# Altium PCB PCB1.PcbDoc
Units mm, origin at the board's own origin, x right, y up, seen from the top; angles counter-clockwise.
Board outline 138.06 x 60 mm, 2 copper layers (Top Layer, Bottom Layer); 63 components, 28 nets, 228 pads, 0 vias.
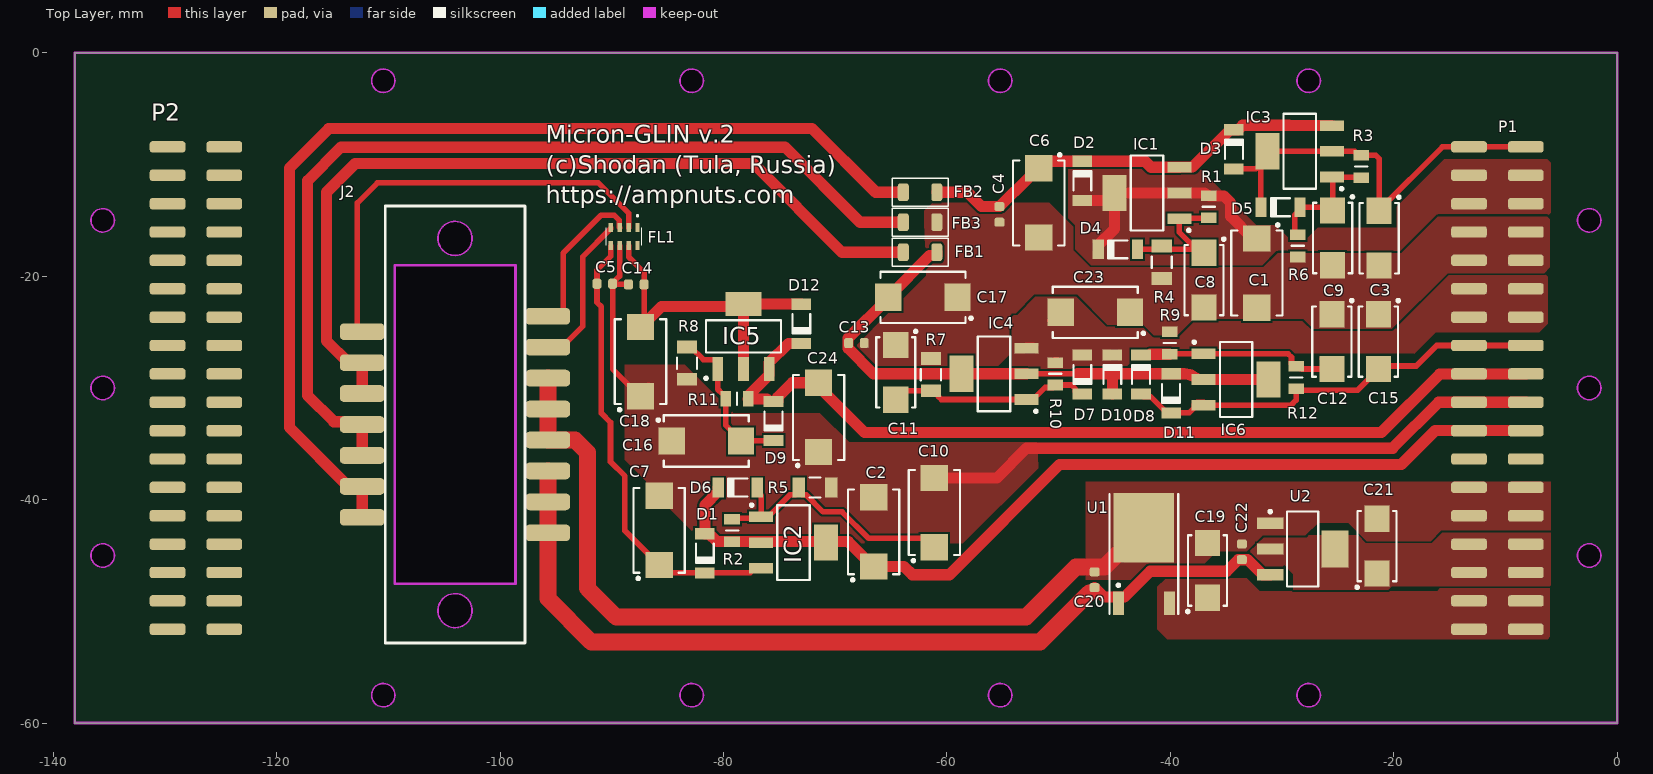
[diagram p0: Top Layer view]
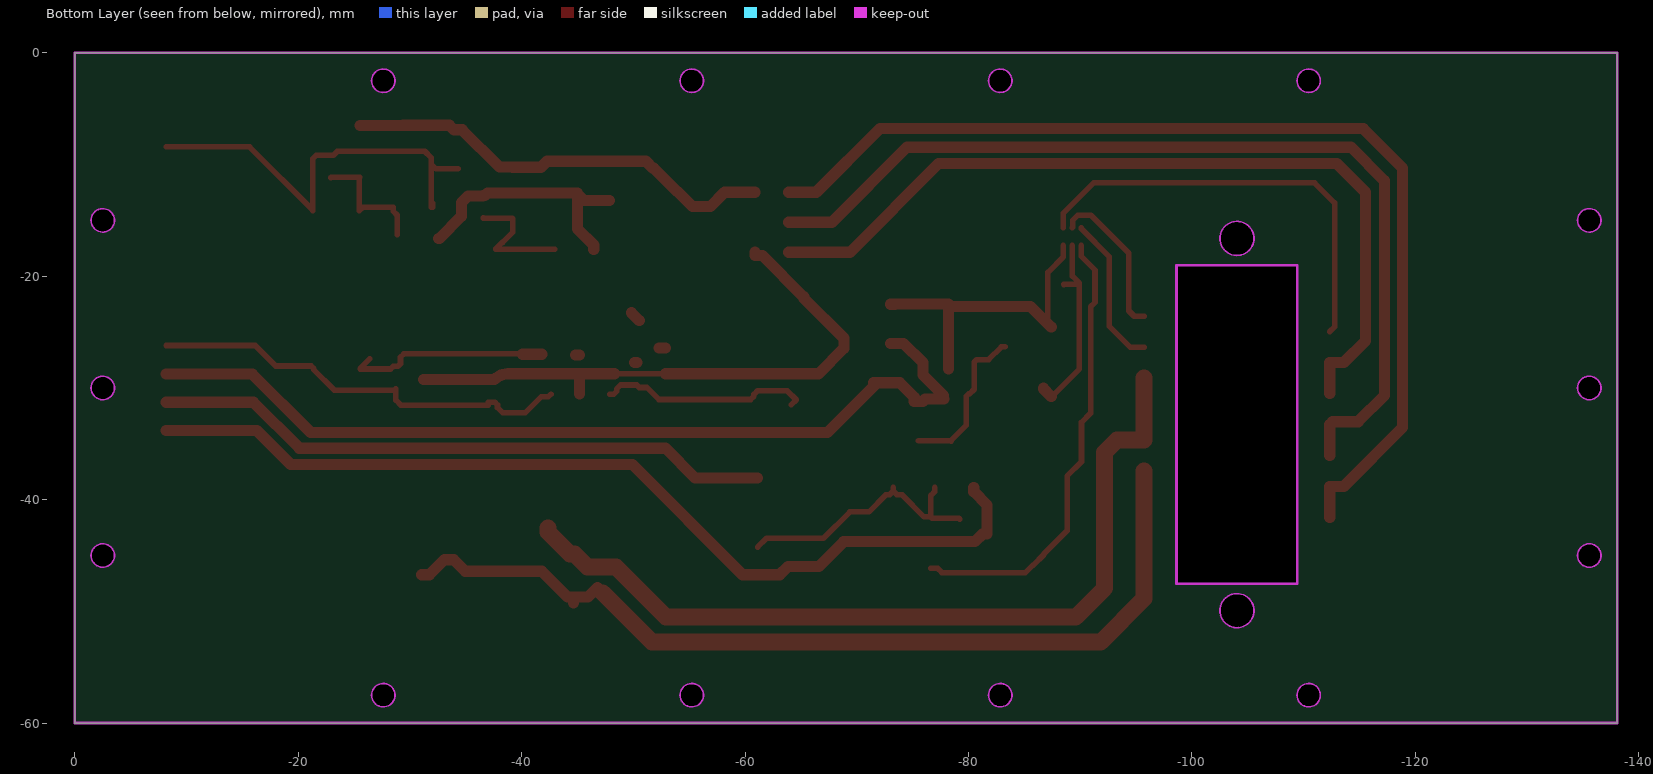
[diagram p1: Bottom Layer view, seen from below]
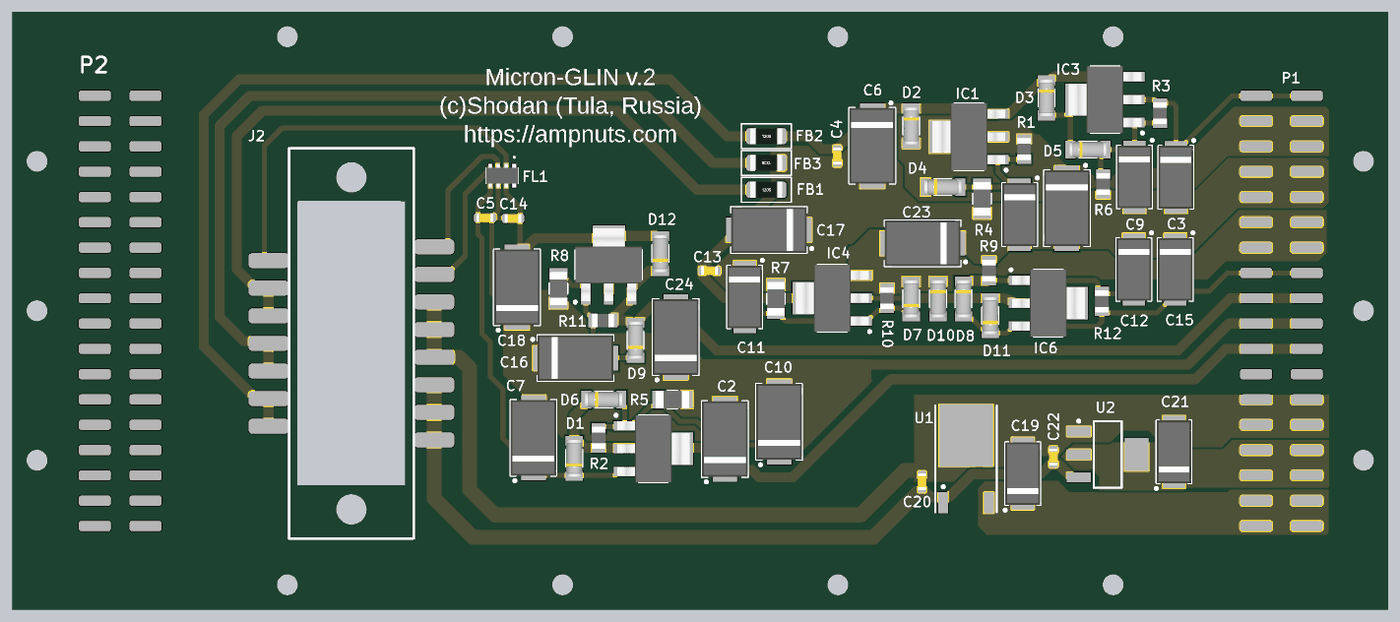
[diagram p2: 3D render of the assembled board from above, using the file's embedded part models]

## Layer stack, top to bottom
Top Solder: solder mask 0.0102, Solder Resist, Dk 3.5
Top Layer: signal copper 0.0356
Dielectric 1: dielectric 0.32, FR-4, Dk 4.8
Bottom Layer: signal copper 0.0356
Bottom Solder: solder mask 0.0102, Solder Resist, Dk 3.5

## Board outline
-138.064,-60 0,-60 0,0 -138.064,0
cut-out: -104.028,-51.458 cw(c-104.028,-49.933) -105.553,-49.933 cw(c-104.028,-49.933) -104.028,-48.408 cw(c-104.028,-49.933) -102.503,-49.933 cw(c-104.028,-49.933)
cut-out: -104.028,-18.138 cw(c-104.028,-16.613) -105.553,-16.613 cw(c-104.028,-16.613) -104.028,-15.088 cw(c-104.028,-16.613) -102.503,-16.613 cw(c-104.028,-16.613)
cut-out: -110.451,-58.55 cw(c-110.451,-57.5) -111.501,-57.5 cw(c-110.451,-57.5) -110.451,-56.45 cw(c-110.451,-57.5) -109.401,-57.5 cw(c-110.451,-57.5)
cut-out: -82.838,-58.55 cw(c-82.838,-57.5) -83.888,-57.5 cw(c-82.838,-57.5) -82.838,-56.45 cw(c-82.838,-57.5) -81.788,-57.5 cw(c-82.838,-57.5)
cut-out: -56.276,-57.5 ccw(c-55.226,-57.5) -55.226,-58.55 ccw(c-55.226,-57.5) -54.176,-57.5 ccw(c-55.226,-57.5) -55.226,-56.45 ccw(c-55.226,-57.5)
cut-out: -28.663,-57.5 ccw(c-27.613,-57.5) -27.613,-58.55 ccw(c-27.613,-57.5) -26.563,-57.5 ccw(c-27.613,-57.5) -27.613,-56.45 ccw(c-27.613,-57.5)
cut-out: -3.55,-45 ccw(c-2.5,-45) -2.5,-46.05 ccw(c-2.5,-45) -1.45,-45 ccw(c-2.5,-45) -2.5,-43.95 ccw(c-2.5,-45)
cut-out: -3.55,-30 ccw(c-2.5,-30) -2.5,-31.05 ccw(c-2.5,-30) -1.45,-30 ccw(c-2.5,-30) -2.5,-28.95 ccw(c-2.5,-30)
cut-out: -3.55,-15 ccw(c-2.5,-15) -2.5,-16.05 ccw(c-2.5,-15) -1.45,-15 ccw(c-2.5,-15) -2.5,-13.95 ccw(c-2.5,-15)
cut-out: -27.613,-3.55 cw(c-27.613,-2.5) -28.663,-2.5 cw(c-27.613,-2.5) -27.613,-1.45 cw(c-27.613,-2.5) -26.563,-2.5 cw(c-27.613,-2.5)
cut-out: -55.226,-3.55 cw(c-55.226,-2.5) -56.276,-2.5 cw(c-55.226,-2.5) -55.226,-1.45 cw(c-55.226,-2.5) -54.176,-2.5 cw(c-55.226,-2.5)
cut-out: -82.838,-3.55 cw(c-82.838,-2.5) -83.888,-2.5 cw(c-82.838,-2.5) -82.838,-1.45 cw(c-82.838,-2.5) -81.788,-2.5 cw(c-82.838,-2.5)
cut-out: -110.451,-3.55 cw(c-110.451,-2.5) -111.501,-2.5 cw(c-110.451,-2.5) -110.451,-1.45 cw(c-110.451,-2.5) -109.401,-2.5 cw(c-110.451,-2.5)
cut-out: -135.564,-16.05 cw(c-135.564,-15) -136.614,-15 cw(c-135.564,-15) -135.564,-13.95 cw(c-135.564,-15) -134.514,-15 cw(c-135.564,-15)
cut-out: -135.564,-31.05 cw(c-135.564,-30) -136.614,-30 cw(c-135.564,-30) -135.564,-28.95 cw(c-135.564,-30) -134.514,-30 cw(c-135.564,-30)
cut-out: -135.564,-46.05 cw(c-135.564,-45) -136.614,-45 cw(c-135.564,-45) -135.564,-43.95 cw(c-135.564,-45) -134.514,-45 cw(c-135.564,-45)
cut-out: -109.428,-19.023 -98.628,-19.023 -98.628,-47.523 -109.428,-47.523

## Design rules (kind name [scope] priority, off if disabled: settings)
BoardOutlineClearance [All] p1: gap=0.25 ignorepadtopadclearanceinfootprint=FALSE
Clearance [All] p1: gap=0.2 ignorepadtopadclearanceinfootprint=FALSE
HoleSize [All] p1: absolutevalues=TRUE maxlimit=5 minlimit=0.9 maxpercent=80.000 minpercent=20.000
HoleToHoleClearance [All] p1: gap=0.2 allowstackedmicrovias=TRUE
PlaneClearance [All] p1: clearance=0.2
PlaneConnect [All] p1: planeconnectstyle=Direct reliefexpansion=0.508 reliefentries=4 reliefconductorwidth=0.254 reliefairgap=0.254
PolygonConnect [All] p1: connectstyle=Direct reliefconductorwidth=0.254 reliefentries=4 polygonreliefangle="90 Angle" airgapwidth=0.254
RoutingLayers [All] p1: top layer_v5=TRUE bottom layer_v5=FALSE
RoutingVias [All] p1: holewidth=0.711 width=1.27 viastyle="Through Hole" minholewidth=0.711 minwidth=1.27 maxholewidth=0.711 maxwidth=1.27
SolderMaskExpansion [All] p1: expansion=0.1 istentingtop=FALSE
Width [All] p1: maxlimit=2 minlimit=0.2 preferedwidth=0.5
25 further rules are at their usual default settings.

## Components (designator, comment, footprint, x,y, rotation, side; value= is the part's Value field where it differs from the comment)
C1 "2.2uF 50V D" CAPMP7343X310N -32.256,-19.712 r270 top
C2 "2.2uF 50V D" CAPMP7343X310N -66.56,-42.88 r90 top
C3 "10uF 16V C" CAPMP6032X280N -21.312,-16.594 r270 top
C4 "100nF 100V 0603" 1608[0603]_CAP -55.296,-14.464 r270 top
C5 "100nF 100V 0603" 1608[0603]_CAP -90.624,-20.672 r0 top
C6 "2.2uF 50V D" CAPMP7343X310N -51.776,-13.44 r270 top
C7 "2.2uF 50V D" CAPMP7343X310N -85.76,-42.752 r90 top
C8 "10uF 35V C" CAPMP6032X280N -36.992,-20.352 r270 top
C9 "10uF 16V C" CAPMP6032X280N -25.472,-16.576 r270 top
C10 "2.2uF 50V D" CAPMP7343X310N -61.12,-41.152 r90 top
C11 "10uF 35V C" CAPMP6032X280N -64.576,-28.608 r270 top
C12 "10uF 16V C" CAPMP6032X280N -25.536,-25.856 r270 top
C13 "100nF 100V 0603" 1608[0603]_CAP -68.096,-25.984 r180 top
C14 "100nF 100V 0603" 1608[0603]_CAP -87.808,-20.736 r0 top
C15 "10uF 16V C" CAPMP6032X280N -21.376,-25.856 r270 top
C16 "2.2uF 50V D" CAPMP7343X310N -81.536,-34.752 r0 top
C17 "2.2uF 50V D" CAPMP7343X310N -62.144,-21.888 r180 top
C18 "2.2uF 50V D" CAPMP7343X310N -87.424,-27.648 r90 top
C19 "10uF 16V C" CAPMP6032X280N -36.672,-46.336 r90 top
C20 "100nF 100V 0603" 1608[0603]_CAP -46.784,-47.168 r90 top
C21 "10uF 16V C" CAPMP6032X280N -21.504,-44.16 r90 top
C22 "100nF 100V 0603" 1608[0603]_CAP -33.6,-44.672 r90 top
C23 "2.2uF 50V D" CAPMP7343X310N -46.72,-23.232 r180 top
C24 "2.2uF 50V D" CAPMP7343X310N -71.488,-32.64 r90 top
D1 "BZV55-C36" DIOMELF3515N -81.664,-44.8 r90 top
D2 "EGL1D" DIOMELF3515N -47.872,-11.456 r270 top
D3 "EGL1D" DIOMELF3515N -34.304,-8.64 r270 top
D4 "EGL1D" DIOMELF3515N -44.7,-17.592 r0 top
D5 "EGL1D" DIOMELF3515N -30.144,-13.824 r0 top
D6 "BZV55-C5V6" DIOMELF3515N -78.72,-38.912 r0 top
D7 "EGL1D" DIOMELF3515N -47.872,-28.8 r90 top
D8 "EGL1D" DIOMELF3515N -42.624,-28.8 r270 top
D9 "BZV55-C5V6" DIOMELF3515N -75.52,-32.96 r90 top
D10 "EGL1D" DIOMELF3515N -45.184,-28.8 r270 top
D11 "EGL1D" DIOMELF3515N -39.936,-30.486 r90 top
D12 "BZV55-C36" DIOMELF3515N -73.024,-24.256 r90 top
FB1 "1k" FB1206 -62.4,-17.856 r0 top value=1u
FB2 "1k" FB1206 -62.4,-12.48 r0 top value=1u
FB3 "1k" FB1206 -62.4,-15.168 r180 top value=1u
FL1 "BLA31AG601SN4D" BLA31AG102SN4D -88.896,-16.448 r270 top
IC1 "LM317DCYR" SOT230P700X180-4N -42.092,-12.544 r180 top
IC2 "LM317DCYR" SOT230P700X180-4N -73.728,-43.84 r0 top
IC3 "LM317DCYR" SOT230P700X180-4N -28.42,-8.813 r180 top
IC4 "LM337IMP" SOT230P700X180-4N -55.788,-28.736 r180 top
IC5 "LM337IMP" SOT230P700X180-4N -78.212,-25.388 r90 top
IC6 "LM337IMP" SOT230P700X180-4N -34.112,-29.248 r0 top
J2 "D-Sub" DB15_PCB_AL;UMINIUM -104.028,-33.273 r270 top
P1 "Header 18X2" "18X2 HEADER ALUMINIUM" -9.454,-8.423 r270 top locked
P2 "Header 18X2" "18x2 header aluminium" -125.954,-8.423 r270 top
R1 "220R 0805" RESC2012X60N -36.546,-13.778 r90 top
R2 "300R 0805" RESC2012X60N -79.232,-42.752 r270 top
R3 "220R 0805" RESC2012X60N -22.912,-10.176 r90 top
R4 "2k4 1206" RESC3216X65N -40.768,-18.752 r90 top
R5 "6k8 1206" RESC3216X65N -71.808,-38.912 r180 top
R6 "1k1 0805" RESC2012X60N -28.608,-17.28 r90 top
R7 "2k4 1206" RESC3216X65N -61.44,-28.8 r90 top
R8 "6k8 1206" RESC3216X65N -83.264,-27.776 r270 top
R9 "1k1 0805" RESC2012X60N -40.064,-25.984 r90 top
R10 "220R 0805" RESC2012X60N -50.304,-28.736 r270 top
R11 "300R 0805" RESC2012X60N -78.784,-30.976 r180 top
R12 "220R 0805" RESC2012X60N -28.736,-29.056 r90 top
U1 "LF50CDT" TO-252 -42.368,-45.888 r0 top
U2 "LD1117AS33TR" SOT-223_N -28.16,-44.416 r0 top

## Footprints (in the part's own frame and the unit in brackets; to place one, negate y for a bottom-side part, rotate by r counter-clockwise, add the part's x,y. Pads: shape width x height; smd on the part's side, far side on the other; paste and mask are expansions set on the pad)
"18X2 HEADER ALUMINIUM" [mm]
  rrect50% 1.02x3.2 smd: 1(0,1.27) 2(0,-3.81) 3(2.54,1.27) 4(2.54,-3.81) 5(5.08,1.27) 6(5.08,-3.81) 7(7.62,1.27) 8(7.62,-3.81) 9(10.16,1.27) 10(10.16,-3.81) 11(12.7,1.27) 12(12.7,-3.81) 13(15.24,1.27) 14(15.24,-3.81) 15(17.78,1.27) 16(17.78,-3.81) 17(20.32,1.27) 18(20.32,-3.81) 19(22.86,1.27) 20(22.86,-3.81) 21(25.4,1.27) 22(25.4,-3.81) 23(27.94,1.27) 24(27.94,-3.81) 25(30.48,1.27) 26(30.48,-3.81) 27(33.02,1.27) 28(33.02,-3.81) 29(35.56,1.27) 30(35.56,-3.81) 31(38.1,1.27) 32(38.1,-3.81) 33(40.64,1.27) 34(40.64,-3.81) 35(43.18,1.27) 36(43.18,-3.81)
"18x2 header aluminium" [mm]
  rrect50% 1.02x3.2 smd: 1(0,1.27) 2(0,-3.81) 3(2.54,1.27) 4(2.54,-3.81) 5(5.08,1.27) 6(5.08,-3.81) 7(7.62,1.27) 8(7.62,-3.81) 9(10.16,1.27) 10(10.16,-3.81) 11(12.7,1.27) 12(12.7,-3.81) 13(15.24,1.27) 14(15.24,-3.81) 15(17.78,1.27) 16(17.78,-3.81) 17(20.32,1.27) 18(20.32,-3.81) 19(22.86,1.27) 20(22.86,-3.81) 21(25.4,1.27) 22(25.4,-3.81) 23(27.94,1.27) 24(27.94,-3.81) 25(30.48,1.27) 26(30.48,-3.81) 27(33.02,1.27) 28(33.02,-3.81) 29(35.56,1.27) 30(35.56,-3.81) 31(38.1,1.27) 32(38.1,-3.81) 33(40.64,1.27) 34(40.64,-3.81) 35(43.18,1.27) 36(43.18,-3.81)
1608[0603]_CAP [mm] "Chip Capacitor, Body 1.6x0.8mm, IPC High Density"
  rrect50% 0.8x0.9 smd: 1(-0.7,0) 2(0.7,0)
  body extent -0.85,-0.45 0.85,0.45, height 0.8
BLA31AG102SN4D [mm]
  rect 0.8x0.4 smd: 1(-0.8,1.2) 2(-0.8,0.4) 3(-0.8,-0.4) 4(-0.8,-1.2) 5(0.8,-1.2) 6(0.8,-0.4) 7(0.8,0.4) 8(0.8,1.2)
  silkscreen extent -1.9,-1.6 0.8,1.6, body extent -1.16,-1.6 1.16,1.6, height 1.1
CAPMP6032X280N [mm] "Capacitor, Polarized, Molded  Body 6.0x3.2mm, IPC Medium Density"
  rect 2.35x2.25 smd: 1(-2.45,0) 2(2.45,0)
  silkscreen extent -3.8,-1.75 3.15,1.9, body extent -3.15,-1.75 3.15,1.75, height 2.8
CAPMP7343X310N [mm] "Capacitor, Polarized, Molded  Body 7.3x4.3mm, IPC Medium Density"
  rect 2.35x2.45 smd: 1(-3.1,0) 2(3.1,0)
  silkscreen extent -4.42,-2.3 3.8,2.3, body extent -3.8,-2.3 3.8,2.3, height 3.1
DB15_PCB_AL;UMINIUM [mm]
  rrect50% 1.5x4 smd: 1(-9.695,8.31) 2(-6.925,8.31) 3(-4.155,8.31) 4(-1.385,8.31) 5(1.385,8.31) 6(4.155,8.31) 7(6.925,8.31) 8(9.695,8.31) 9(-8.31,-8.31) 10(-5.54,-8.31) 11(-2.77,-8.31) 12(0,-8.31) 13(2.77,-8.31) 14(5.54,-8.31) 15(8.31,-8.31)
  Keep-Out Layer circle w0.15: c16.66,0 r1.525
  Keep-Out Layer circle w0.15: c-16.66,0 r1.525
  Keep-Out Layer lines w0.254: 14.25,-5.4 -14.25,-5.4 -14.25,5.4 14.25,5.4 14.25,-5.4
  silkscreen extent -19.57,-6.25 19.57,6.25
DIOMELF3515N [mm] "SOD80C, MELF Diode, 2-Leads, Body 3.5x1.5mm, IPC Medium Density"
  rect 1x1.75 smd: 1(-1.75,0) 2(1.75,0)
  silkscreen extent -0.85,-0.8 0.85,0.8, body extent -1.85,-0.8 1.85,0.8, height 1.6
FB1206 [mm]
  rrect50% 1x1.6 smd: 1(-1.5,0) 2(1.5,0)
  silkscreen extent -2.5,-1.25 2.5,1.25, body extent -1.6,-0.8 1.6,0.8, height 0.6
RESC2012X60N [mm] "Chip Resistor, EIA 0805, Metric 2012, Body 2.0x1.2mm, IPC Medium Density"
  rect 0.95x1.4 smd: 1(-1,0) 2(1,0)
  silkscreen extent 0,-0.55 0,0.55, body extent -1.1,-0.67 1.1,0.68, height 0.6
RESC3216X65N [mm] "Chip Resistor, EIA 1206, Metric 3216, Body 3.2x1.6mm, IPC Medium Density"
  rect 1.15x1.8 smd: 1(-1.45,0) 2(1.45,0)
  silkscreen extent -0.5,-0.9 0.5,0.9, body extent -1.67,-0.87 1.68,0.88, height 0.65
SOT230P700X180-4N [mm] "SOT223, 2.30mm pitch; 3 pin, 3.70mm W X 6.70mm L, IPC Medium Density"
  rect 2.15x0.95 smd: 1(-2.9,2.3) 2(-2.9,0) 3(-2.9,-2.3)
  rect 2.15x3.25 smd: 4(2.9,0)
  silkscreen extent -3.88,-3.35 1.45,3.47, body extent -3.65,-3.35 3.65,3.35, height 1.81
SOT-223_N [mm] "SOT223, 4-Leads, Body 6.5x3.5mm, Pitch 2.3mm, Lead Span 7mm, IPC Medium Density"
  rect 2.4x1 smd: 1(-2.9,2.3) 2(-2.9,0) 3(-2.9,-2.3)
  rect 2.4x3.3 smd: 4(2.9,0)
  silkscreen extent -3.02,-3.35 1.4,3.47, body extent -1.85,-3.35 1.85,3.35, height 1.8
TO-252 [mm] "D-PAK/TO-252-AA; 3 Leads (1 Cropped); Body 10.1 (inc. leads) x 6.6 mm (LxW max)"
  rect 1x2.1 smd: 1(-2.285,-3.375) 3(2.285,-3.375)
  rect 5.4x6.2 smd: 4(0,3.375)
  silkscreen extent -3.09,-4.32 3.09,6.38

## Part data
C1 C2 C6 C7 C10 C16 C17 C18 C23 C24: library part CTE7343-31_22UF_35V_20%_LESR0400, "Polarised capacitor", Case=D, Manufacturer=GENERIC, Manufacturer1 ComponentHeight=3.1mm, Manufacturer1 Example=AVX, Manufacturer1 Part Number=TPSD226M035R0400, Tolerance=±20%, Voltage=35V, Author="CERN DEM MR", Component Type=Standard, CreateDate=19.05.2016, HelpURL=\\cern.ch\dfs\Applications\Altium\Datasheets\CTE-LESR_AVX_TPS.pdf, LatestRevisionDate=19.05.2016, Manufacturer Part Number=CTE7343-31_22UF_35V_20%_LESR0400, Mounted=Yes, Part Description="Low ESR 0R4 Solid Tantalum Chip Capacitor", Part Number=CTE7343-31_22UF_35V_20%_LESR0400, Pin Count=2, Sense=No, SMD=Yes, Socket=No, Status=None
C3 C8 C9 C11 C12 C15 C19 C21: library part CTE6032-28_10UF_25V_10%_LESR0500, "Polarised capacitor", Case=C, Manufacturer=GENERIC, Manufacturer1 ComponentHeight=2.8mm, Manufacturer1 Example=AVX, Manufacturer1 Part Number=TPSC106K025R0500, Tolerance=±10%, Voltage=25V, Author="CERN DEM JLC", Component Type=Standard, CreateDate=05.05.2008, HelpURL=\\cern.ch\dfs\Applications\Altium\Datasheets\CTE-LESR_AVX_TPS.pdf, LatestRevisionDate=20.01.2009, Manufacturer Part Number=CTE6032-28_10UF_25V_10%_LESR0500, Mounted=Yes, Part Description="Low ESR 0R5 Solid Tantalum Chip Capacitor", Part Number=CTE6032-28_10UF_25V_10%_LESR0500, Pin Count=2, Sense=No, SMD=Yes, Socket=No, Status=Preferred
C4 C5 C13 C14 C20 C22: library part "Cap Semi", "Capacitor (Semiconductor SIM Model)", LatestRevisionDate=29-May-2009, LatestRevisionNote="IPC-7351 Footprint Added.", Order=GRM31CR71A475KA01L, PackageDescription="Chip Capacitor", PackageReference=C1206, Published=8-Jun-2000, Publisher="Altium Limited"
D1 D6 D9 D12: library part BZV55-C12, "Zener Diode", Case=SOD-80C, Manufacturer="NXP SEMICONDUCTORS", Power=500mW, Voltage=12V, Author="CERN DEM MR", Bonding=No, Component Type=Standard, ComponentHeight=1.6mm, CreateDate=19.05.2016, HelpURL=\\cern.ch\dfs\Applications\Altium\Datasheets\BZV55.pdf, LatestRevisionDate=19.05.2016, Manufacturer Part Number=BZV55-C12, Mounted=Yes, PackageDescription="SOD80C, MELF Diode, 2-Leads, Body 3.5x1.5mm, IPC Medium Density", Part Description="Voltage Regulator Diode", Part Number=BZV55-C12, Pin Count=2, PressFit=No, Sense=No, SMD=Yes, Socket=No
  D1 D12: Device=BZV55-C36
  D6 D9: Device=BZV55-C5V6
D2 D3 D4 D5 D7 D8 D10 D11: library part PMLL4148L, "Diode", Case=SOD-80C, Manufacturer="NXP SEMICONDUCTORS", Power=200mA, Voltage=75V, Author="CERN DEM JLC", Bonding=No, Component Type=Standard, ComponentHeight=1.6mm, CreateDate=30.03.2009, Device=EGL1D, HelpURL=\\cern.ch\dfs\Applications\Altium\Datasheets\PMLL4148L.pdf, LatestRevisionDate=09.12.2009, Manufacturer Part Number=PMLL4148L, Mounted=Yes, PackageDescription="SOD80C, MELF Diode, 2-Leads, Body 3.5x1.5mm, IPC Medium Density", Part Description="High-speed switching diodes", Part Number=PMLL4148L, Pin Count=2, PressFit=No, Sense=No, SMD=Yes, Socket=No, Status="Not recommended"
FB1 FB2 FB3: library part "Chip FB BLM31P", "1206 1.5A 0.08ohm", Price=0.16
FL1: "Filter", Manufacturer_Name="Murata Electronics", Mouser Part Number=81-BLA3216A601SG4, Arrow Part Number=BLA31AG601SN4D, Arrow Price/Stock=https://www.arrow.com/en/products/bla31ag601sn4d/murata-manufacturing, Datasheet Link=https://www.murata.com/en-us/products/productdetail?partno=BLA31AG601SN4%23, Height=1mm, Manufacturer_Part_Number=BLA31AG601SN4D, Mouser Price/Stock=https://www.mouser.co.uk/ProductDetail/Murata-Electronics/BLA31AG601SN4D?qs=2ahBf5rJw09FDcUVkQibEg%3D%3D
IC1 IC2 IC3: library part LM317EMP, "3-Terminal Regulator 1=Adj 2=OUT 3=IN 4=OUT", Case=SOT-223, Manufacturer="TEXAS INSTRUMENTS", Author="CERN DEM JLC", Bonding=No, Component Type=Standard, ComponentHeight=1.8mm, CreateDate=02.12.2008, Device=LM317DCYR, HelpURL=\\cern.ch\dfs\Applications\Altium\Datasheets\LM317EMP.pdf, LatestRevisionDate=16.09.2014, Manufacturer Part Number=LM317EMP, Mounted=Yes, PackageDescription="SOT223, 2.30mm pitch; 3 pin, 3.70mm W X 6.70mm L, IPC Medium Density", Part Description="3-Terminal 1.2V To 37V 1A Positive Adjustable Regulator", Part Number=LM317EMP, Pin Count=4, PressFit=No, Sense=No, SMD=Yes, Socket=No, Status="Not Recommended"
IC4 IC5 IC6: library part LM337IMP/NOPB, "3-Terminal Regulator 1=Adj 2=IN 3=OUT 4=IN", Case=SOT-223, Manufacturer="TEXAS INSTRUMENTS", Author="CERN DEM JLC", Bonding=No, Component Type=Standard, ComponentHeight=1.8mm, CreateDate=31.08.2010, Device=LM337IMP, HelpURL=\\cern.ch\dfs\Applications\Altium\Datasheets\LM337IMP-NOPB.pdf, LatestRevisionDate=21.09.2015, Manufacturer Part Number=LM337IMP/NOPB, Mounted=Yes, PackageDescription="SOT223, 2.30mm pitch; 3 pin, 3.70mm W X 6.70mm L, IPC Medium Density", Part Description="3-Terminal -1.2V To -37V 1A Adjustable Negative Regulator", Part Number=LM337IMP/NOPB, Pin Count=4, PressFit=No, Sense=No, SMD=Yes, Socket=No
J2: library part AMPHENOL_L117DFA15P1ATN, "Connector D-sub 15 Male", Manufacturer=AMPHENOL, Manufacturer Part Number=L717DFA15P1ATN, Author="CERN DEM JLC", Component Type=Standard, ComponentHeight=13.4mm, CreateDate=05.05.2009, Family=D-Sub, HelpURL=\\cern.ch\dfs\Applications\Altium\Datasheets\AMPHENOL_L717DFA15P1ATN.pdf, LatestRevisionDate=14.07.2011, Mounted=Yes, Part Description="Right Angled D-Sub 15 Male Contacts with Metal Bracket and Front Female Screwlock (UNC4-40)", Part Number=AMPHENOL_L117DFA15P1ATN, Pin Count=17, PressFit=No, Sense=No, SMD=No, Socket=No, Status=None
P1 P2: "Header, 18-Pin, Dual row", LatestRevisionDate=17-Jul-2002, LatestRevisionNote="Re-released for DXP Platform.", Publisher="Altium Limited"
R1 R2 R3 R10 R11 R12: library part R0805_220R_1%_0.125W_100PPM, "Resistor - 1%", Case=0805, Manufacturer=GENERIC, Manufacturer1 ComponentHeight=0.6mm, Manufacturer1 Example="NIC COMPONENT", Manufacturer1 Part Number=NRC10F2200TRF, Power=0.125W, Tolerance=±1%, Author="CERN DEM JLC", Component Type=Standard, CreateDate=03.12.2007, HelpURL=\\cern.ch\dfs\Applications\Altium\Datasheets\R0805_NIC_NRC.pdf, LatestRevisionDate=13.03.2008, Manufacturer Part Number=R0805_220R_1%_0.125W_100PPM, Mounted=Yes, Part Description="General Purpose Thick Film Chip Resistor", Part Number=R0805_220R_1%_0.125W_100PPM, Pin Count=2, PressFit=No, Sense=No, SMD=Yes, Socket=No, Status=Preferred, TC=±100ppm/°C
R4 R5 R7 R8: library part R1206_2K4_1%_0.25W_100PPM, "Resistor - 1%", Case=1206, Manufacturer=GENERIC, Manufacturer1 ComponentHeight=0.65mm, Manufacturer1 Example="NIC COMPONENT", Manufacturer1 Part Number=NRC12F2401TRF, Power=0.25W, Tolerance=±1%, Author="CERN DEM JLC", Component Type=Standard, CreateDate=03.12.2007, HelpURL=\\cern.ch\dfs\Applications\Altium\Datasheets\R1206_NIC_NRC.pdf, LatestRevisionDate=13.03.2008, Manufacturer Part Number=R1206_2K4_1%_0.25W_100PPM, Mounted=Yes, Part Description="General Purpose Thick Film Chip Resistor", Part Number=R1206_2K4_1%_0.25W_100PPM, Pin Count=2, PressFit=No, Sense=No, SMD=Yes, Socket=No, Status=Preferred, TC=±100ppm/°C
R6 R9: library part R0805_1K1_1%_0.125W_100PPM, "Resistor - 1%", Case=0805, Manufacturer=GENERIC, Manufacturer1 ComponentHeight=0.6mm, Manufacturer1 Example="NIC COMPONENT", Manufacturer1 Part Number=NRC10F1101TRF, Power=0.125W, Tolerance=±1%, Author="CERN DEM JLC", Component Type=Standard, CreateDate=03.12.2007, HelpURL=\\cern.ch\dfs\Applications\Altium\Datasheets\R0805_NIC_NRC.pdf, LatestRevisionDate=13.03.2008, Manufacturer Part Number=R0805_1K1_1%_0.125W_100PPM, Mounted=Yes, Part Description="General Purpose Thick Film Chip Resistor", Part Number=R0805_1K1_1%_0.125W_100PPM, Pin Count=2, PressFit=No, Sense=No, SMD=Yes, Socket=No, Status=Preferred, TC=±100ppm/°C
U1: "500mA, Very Low Drop (0.45V) Voltage Regulator", ComponentLink1Description="Manufacturer Link", ComponentLink1URL=http://www.st.com/, ComponentLink2Description=Datasheet, ComponentLink2URL=http://www.st.com/stonline/books/pdf/docs/2574.pdf, DatasheetVersion=Feb-2004, LatestRevisionDate=06-Jun-2005, LatestRevisionNote="PCB pads lengthened.", PackageDescription="D-PAK/TO-252-AA; 3 Leads (1 Cropped); Body 10.1 (inc. leads) x 6.6 mm (LxW max)", PackageReference=TO-252, PackageVersion=Jun-2004, Published=24-Aug-2001, Publisher="Altium Limited"
U2: "1A, Low Drop Positive Voltage Regulator, 3.3V, 4-Pin SOT-223, Tape and Reel", ComponentLink1Description="Manufacturer URL", ComponentLink1URL=http://www.st.com, ComponentLink2Description=Datasheet, ComponentLink2URL=http://www.st.com/internet/com/TECHNICAL_RESOURCES/TECHNICAL_LITERATURE/DATASHEET/CD00002116.pdf, DatasheetVersion=Dec-2011, PackageDescription="4-Pin SOT-223 Package, 6.5 x 3.5 mm Body, 2.3 mm Pitch, 7 mm Lead Span", PackageReference=SOT-223, PackageVersion=2010, PartNumber=LD1117AS33TR

## Nets (pads, with @x,y where several pads share a name; then routed paths per layer and width w, separated by ;. In a path a pad name is that pad's centre, name@x,y a point inside that pad or via, vN(x,y) a via of type N, cw(c..) or ccw(c..) an arc to the next point about the centre after c; other vN are vias at no path point)
+3.3V: C21.1 P1.29 P1.30 P1.31 P1.32 U2.2 U2.4
+5V: C19.1 P1.33 P1.34 P1.35 P1.36 U1.3
+7.5V: C3.1 D3.2 D5.1 IC3.2 IC3.4 P1.1 P1.2 R3.2 | length 38.7
  Top Layer w0.5: D3.2 -32.347,-10.39 IC3.4@-31.894,-9.937 ; D5.1@-32.022,-13.824 D5.1@-32.022,-13.449 ; D5.1 IC3.4@-31.894,-9.937 ; C3.1 C3.1@-21.312,-14.094 ; P1.1 P1.2 -15.641,-8.423 C3.1@-21.312,-14.094 ; IC3.4@-31.894,-9.937 -31.894,-9.387 IC3.4 IC3.2 -23.5,-8.813 -23.137,-9.176 R3.2 -21.605,-9.176 -21.312,-9.469 C3.1@-21.312,-14.094
+7V_unreg: C20.1 C22.1 J2.6 J2.7 J2.8 U1.1 U2.3 | length 82.6
  Top Layer w1: -47.266,-48.35 C20.1 -45.939,-48.713 U1.1@-44.653,-48.713 ; U1.1 U1.1@-44.653,-48.713 ; U2.3 -31.76,-46.716 -33.104,-45.372 -33.916,-45.372 -34.944,-46.4 -41.79,-46.4 -44.103,-48.713 U1.1@-44.653,-48.713
  Top Layer w1.5: J2.6 J2.7 J2.8 -95.718,-48.858 -91.84,-52.736 -51.652,-52.736 -47.266,-48.35
+15V: C1.1 D2.2 D4.1 IC1.2 IC1.4 P1.3 P1.4 P1.5 P1.6 R1.2 | length 23.6
  Top Layer w1: D2.2 -45.567,-13.206 IC1.4@-44.992,-12.631 ; D4.1 -46.45,-17.217 -44.992,-15.759 IC1.4@-44.992,-12.631 ; C1.1@-32.576,-16.612 -32.626,-16.612 -34.611,-14.627 -34.611,-13.389 -35.197,-12.803 -36.521,-12.803 R1.2 -36.721,-12.778 -36.955,-12.544 IC1.2 IC1.4 IC1.4@-44.992,-12.631
"+22V unreg": C4.1 C6.1 D2.1 D3.1 FB2.2 IC1.3 IC3.3 | length 39.4
  Top Layer w1: FB2.2 -58.176,-12.48 -56.892,-13.764 C4.1 -53.961,-12.429 -53.915,-12.429 -51.826,-10.34 C6.1 -51.142,-9.706 D2.1 -42.262,-9.706 -41.724,-10.244 IC1.3 -39.167,-10.219 -38.008,-10.219 -34.679,-6.89 D3.1 -33.929,-6.89 -33.527,-6.488 -29.403,-6.488 -29.378,-6.513 IC3.3
+30V: C2.1 D1.2 D6.1 IC2.2 IC2.4 P1.21 P1.22 R2.2 | length 85
  Top Layer w1: D6.1 -80.47,-39.287 -81.664,-40.481 D1.2 -81.289,-43.05 -80.587,-43.752 R2.2 -68.838,-43.752 -66.61,-45.98 C2.1 -63.835,-45.98 -63.095,-46.72 -59.766,-46.72 -49.91,-36.864 -19.328,-36.864 -16.287,-33.823 P1.22 P1.21
"+36V unreg": C5.1 C7.1 D1.1 FL1.5 IC2.3 | length 41
  Top Layer w0.5: FL1.5 -90.096,-18.224 -91.324,-19.452 C5.1 -91.324,-22.34 -90.944,-22.72 -90.944,-32.256 -90.112,-33.088 -90.112,-36.608 -88.832,-37.888 -88.832,-42.78 -86.735,-44.877 -86.735,-44.927 -85.81,-45.852 C7.1 -85.084,-46.528 -77.616,-46.528 -77.228,-46.14 IC2.3
-7.5V: C15.2 D8.2 D11.1 IC6.3 P1.15 P1.16 R12.1 | length 38.7
  Top Layer w0.5: D8.2 -42.374,-30.8 -41.747,-30.8 -40.311,-32.236 D11.1 -38.311,-32.236 -37.837,-31.762 -37.837,-31.517 -37.612,-31.292 IC6.3@-37.012,-31.292 ; IC6.3 -29.188,-31.548 -28.736,-31.096 R12.1 -28.584,-30.208 -23.228,-30.208 -21.376,-28.356 -21.376,-28.256 -21.152,-28.032 -17.984,-28.032 -16.155,-26.203 P1.16 P1.15
-15V: C23.2 D7.2 D10.1 IC4.3 P1.11 P1.12 P1.13 P1.14 R10.1 | length 2.3
  Top Layer w1: IC4.3 -52.338,-26.436 IC4.3@-52.313,-26.411 ; C23.2@-50.545,-23.957 -50.495,-23.957 -49.82,-23.282 C23.2 ; R10.1@-50.329,-27.711 R10.1 -50.279,-27.711 R10.1@-50.104,-27.711 ; D10.1 D10.1@-44.809,-27.05
"-22V unreg": C13.2 C17.2 D10.2 D11.2 FB1.2 IC4.2 IC4.4 IC6.2 IC6.4 | length 52.9
  Top Layer w0.5: IC4.2 -48.32,-28.736
  Top Layer w1: FB1.2 -60.9,-18.156 -61.562,-18.156 -65.244,-21.838 C17.2 -65.244,-21.938 -68.855,-25.549 -68.855,-26.441 -66.56,-28.736 IC4.4 IC4.2 ; -48.32,-28.736 -44.992,-28.736 ; D10.2 -45.184,-28.928 -44.992,-28.736 ; IC6.4 IC6.2 -37.562,-29.248 ccw(c-38.798,-30.484) -38.798,-28.736 -39.228,-28.736 ccw(c-39.232,-29.736) -39.232,-28.736 -44.992,-28.736
-30V: C24.2 D9.2 D12.1 IC5.3 P1.17 P1.18 R11.1 | length 82.5
  Top Layer w1: D12.1 -74.18,-26.006 -75.912,-27.738 IC5.3 -75.912,-28.838 -77.759,-30.685 -77.759,-30.951 R11.1 -76.129,-30.976 -75.895,-31.21 D9.2 -75.145,-31.21 -75.145,-30.835 -73.85,-29.54 C24.2 ; C24.2@-71.808,-29.604 -71.758,-29.604 -67.378,-33.984 -21.12,-33.984 -15.879,-28.743 P1.18 P1.17
"-36V unreg": C14.2 C18.2 D12.2 FL1.7 IC5.2 IC5.4 | length 29.1
  Top Layer w0.5: FL1.7 -88.496,-18.256 -87.104,-19.648 C14.2@-87.104,-20.736 ; C18.2 -87.108,-24.232 C14.2
  Top Layer w1: C18.2 -87.374,-24.548 -85.546,-22.72 -78.444,-22.72 IC5.4 ; IC5.2 IC5.4 ; D12.2 -73.399,-22.506 -73.417,-22.488 IC5.4
AGND_22: C1.2 C3.2 C4.2 C6.2 C8.2 C9.2 C11.1 C12.1 C13.1 C15.1 C17.1 C23.1 FB3.1 P1.7 P1.8 P1.9 P1.10 R4.1 R6.1 R7.2 R9.2
AGND_36: C2.2 C5.2 C7.2 C10.2 C14.1 C16.1 C18.1 C24.1 FL1.6 P1.19 P1.20 R5.1 R8.2 | length 73.1
  Top Layer w0.5: FL1.6 -89.296,-19.994 -89.924,-20.622 C5.2 ; C14.1 -88.54,-20.704 -89.892,-20.704 C5.2 ; C18.1 -87.474,-30.748 -89.924,-28.298 C5.2
  Top Layer w1: C18.1 -87.374,-30.748 -86.699,-30.073 C18.1@-86.699,-30.023 ; C10.2 -55.524,-38.052 -52.864,-35.392 -20.096,-35.392 -15.987,-31.283 P1.19
DGND: C19.2 C20.2 C21.2 C22.2 J2.3 J2.4 J2.5 P1.25 P1.26 P1.27 P1.28 U1.4 U2.1 | length 76.1
  Top Layer w1.5: J2.3 J2.4 J2.5 -93.278,-34.658 -92.16,-35.776 -92.16,-47.936 -89.6,-50.496 -52.928,-50.496 -48.448,-46.016 -45.871,-46.016 -44.718,-44.863 -44.318,-44.863 -42.368,-42.913 U1.4
NetC8_1: C8.1 D4.2 IC1.1 R1.1 R4.2 | length 11.3
  Top Layer w0.5: D4.2 -37.686,-17.592 -37.686,-17.542 -38.251,-16.977 -38.284,-16.977 -39.192,-16.069 IC1.1 -39.159,-14.811 -36.579,-14.811 R1.1
NetC9_1: C9.1 D5.2 IC3.1 R3.1 R6.2 | length 11.4
  Top Layer w0.5: R6.2@-28.864,-16.28 -28.864,-14.541 -28.522,-14.199 -28.522,-13.824 -25.774,-13.824 C9.1 -25.472,-11.161 -25.489,-11.144 -22.944,-11.144 R3.1
NetC10_1: C10.1 D6.2 IC2.1 R2.1 R5.2 | length 24.3
  Top Layer w0.5: R2.1 -79.126,-41.646 -76.734,-41.646 IC2.1 ; D6.2 -76.97,-39.287 -76.628,-39.629 IC2.1 ; R5.2 R5.2@-73.258,-39.237 ; C10.1 -61.916,-43.456 -67.008,-43.456 -69.376,-41.088 -71.082,-41.088 -72.608,-39.562 -72.933,-39.562 R5.2@-73.258,-39.237 ; IC2.1 -76.028,-41.54 -74.05,-39.562 -73.583,-39.562 R5.2@-73.258,-39.237
NetC11_2: C11.2 D7.1 IC4.1 R7.1 R10.2 | length 19.1
  Top Layer w0.5: C11.2@-64.146,-31.488 C11.2 -63.768,-30.25 -61.115,-30.25 -60.79,-30.575 -60.79,-30.743 -60.497,-31.036 IC4.1 -52.288,-31.036 -51.213,-29.961 -50.529,-29.961 R10.2 -48.854,-29.736 -48.497,-30.093 -48.497,-30.3 -48.247,-30.55 D7.1
NetC12_2: C12.2 D8.1 IC6.1 R9.1 R12.2 | length 18.5
  Top Layer w0.5: R9.1 -40.028,-26.948 -29.449,-26.948 -29.157,-27.241 -29.157,-27.831 -28.932,-28.056 -28.511,-28.056 -28.261,-28.306 C12.2 -25.536,-28.256 C12.2@-26.411,-27.381
  Top Layer w1: D8.1@-41.803,-26.984 R9.1
NetC16_2: C16.2 D9.1 IC5.1 R8.1 R11.2 | length 14.2
  Top Layer w0.5: R8.1 -82.939,-26.326 -81.802,-27.463 -80.737,-27.463 -80.512,-27.688 IC5.1 -80.512,-30.113 -80.099,-30.526 -80.009,-30.526 -79.784,-30.751 R11.2 -79.784,-33.354 -78.436,-34.702 C16.2 -78.394,-34.71 D9.1
NetFB1_1: FB1.1 J2.10 J2.11 | length 76
  Top Layer w1: J2.11 J2.10 -113.588,-27.733 -115.52,-25.801 -115.52,-12.48 -112.96,-9.92 -77.312,-9.92 -69.376,-17.856 FB1.1
NetFB2_1: FB2.1 J2.14 J2.15 | length 93.5
  Top Layer w1: J2.15 J2.14 -113.588,-38.813 -118.848,-33.553 -118.848,-10.304 -115.328,-6.784 -72.064,-6.784 -66.368,-12.48 FB2.1
NetFB3_2: FB3.2 J2.12 J2.13 | length 85.3
  Top Layer w1: J2.13 J2.12 -112.588,-33.023 -114.881,-33.023 -117.248,-30.656 -117.248,-11.456 -114.24,-8.448 -74.496,-8.448 -67.776,-15.168 FB3.2
NetFL1_2: FL1.2 J2.9 | length 39.1
  Top Layer w0.5: J2.9 -112.768,-24.533 -112.768,-13.44 -110.976,-11.648 -91.2,-11.648 -88.496,-14.352 FL1.2
NetFL1_3: FL1.3 J2.1 | length 14
  Top Layer w0.5: J2.1 -94.833,-23.578 -94.343,-23.088 -94.343,-17.927 -90.944,-14.528 -89.792,-14.528 -89.346,-14.974 -89.346,-15.598 FL1.3
NetFL1_4: FL1.4 J2.2 | length 13.8
  Top Layer w0.5: J2.2 -94.468,-26.348 -92.608,-24.488 -92.608,-18.26 -90.096,-15.748 FL1.4
pads on no net: FL1.1 FL1.8 P1.23 P1.24 P2.1 P2.2 P2.3 P2.4 P2.5 P2.6 P2.7 P2.8 P2.9 P2.10 P2.11 P2.12 P2.13 P2.14 P2.15 P2.16 P2.17 P2.18 P2.19 P2.20 P2.21 P2.22 P2.23 P2.24 P2.25 P2.26 P2.27 P2.28 P2.29 P2.30 P2.31 P2.32 P2.33 P2.34 P2.35 P2.36

## Polygon pours and split planes (outlines as drawn)
AGND_36 on Top Layer "AGND_36_L01_P026" (solid, pour order 26): -51.891,-34.88 -68.736,-34.88 -71.36,-32.256 -79.104,-32.256 -83.456,-27.904 -88.832,-27.904 -88.832,-36.416 -86.912,-38.336 -86.912,-38.72 -81.728,-43.904 -58.56,-43.904 -51.84,-37.184
+5V on Top Layer "+5V_L01_P024" (solid, pour order 24): -6.016,-47.744 -6.016,-52.288 -6.208,-52.48 -40.256,-52.48 -41.152,-51.584 -41.152,-47.808 -40.384,-47.04 -33.152,-47.04 -32,-48.192 -16.128,-48.192 -15.616,-47.68
+3.3V on Top Layer "+3.3V_L01_P022" (solid, pour order 22): -33.152,-44.608 -31.744,-43.2 -22.912,-43.2 -22.4,-43.712 -16.704,-43.712 -15.744,-42.752 -5.952,-42.752 -5.952,-47.68 -6.016,-47.744 -20.16,-47.744 -20.48,-48.064 -28.992,-48.064 -28.992,-46.656 -29.824,-45.824 -29.952,-45.952 -31.808,-45.952
DGND on Top Layer "DGND_L01_P021" (solid, pour order 21): -5.952,-38.4 -47.552,-38.4 -47.552,-47.168 -38.4,-47.168 -35.84,-44.608 -33.152,-44.608 -31.744,-43.2 -27.904,-43.2 -26.752,-42.048 -24.064,-42.048 -22.4,-43.712 -16.704,-43.712 -15.744,-42.752 -5.952,-42.752
AGND_22 on Top Layer "AGND_22_L01_P019" (solid, pour order 19): -61.824,-19.904 -68.032,-26.112 -68.032,-26.816 -66.432,-28.416 -66.368,-28.352 -55.744,-28.352 -54.144,-26.752 -54.144,-23.296
-15V on Top Layer "-15V_L01_P018" (solid, pour order 18): -6.528,-19.712 -6.208,-20.032 -6.208,-24.256 -6.976,-25.024 -16.256,-25.024 -18.176,-26.944 -18.24,-26.88 -42.688,-26.88 -44.416,-28.608 -54.208,-28.608 -54.208,-23.68 -52.16,-21.632 -48.32,-21.632 -45.44,-24.512 -41.792,-24.512 -40.896,-25.408 -40.768,-25.28 -39.104,-25.28 -39.104,-25.024 -37.888,-23.808 -28.096,-23.808 -27.2,-24.704 -19.648,-24.704 -19.648,-24.192 -15.168,-19.712
+15V on Top Layer "+15V_L01_P017" (solid, pour order 17): -49.152,-10.176 -49.152,-15.04 -48.512,-15.68 -48.512,-17.856 -47.168,-19.2 -31.68,-19.2 -30.4,-17.92 -19.328,-17.92 -16.064,-14.656 -6.272,-14.656 -5.952,-14.336 -5.952,-9.856 -6.272,-9.536 -15.488,-9.536 -19.712,-13.76 -19.712,-15.68 -26.816,-15.68 -27.904,-16.768 -29.312,-16.768 -29.312,-16.704 -30.592,-15.424 -32.32,-15.424 -37.504,-10.24 -43.392,-10.24
AGND_22 on Top Layer "AGND_22_L01_P016" (solid, pour order 16): -62.016,-15.168 -62.016,-14.144 -61.312,-13.44 -50.816,-13.44 -48.704,-15.552 -48.704,-17.664 -47.168,-19.2 -31.68,-19.2 -30.4,-17.92 -19.328,-17.92 -16.064,-14.656 -6.272,-14.656 -6.016,-14.912 -6.016,-19.2 -6.528,-19.712 -15.168,-19.712 -20.16,-24.704 -27.2,-24.704 -28.096,-23.808 -37.888,-23.808 -39.36,-25.28 -41.472,-25.28 -42.432,-24.32 -45.632,-24.32 -48.32,-21.632 -52.16,-21.632 -53.824,-23.296 -61.696,-23.296

## Keep-outs
Keep-Out Layer:
  circle w0.15: c-2.5,-45 r1.05
  circle w0.15: c-2.5,-30 r1.05
  circle w0.15: c-2.5,-15 r1.05
  circle w0.15: c-135.564,-15 r1.05
  circle w0.15: c-135.564,-30 r1.05
  circle w0.15: c-135.564,-45 r1.05
  circle w0.15: c-27.613,-57.5 r1.05
  circle w0.15: c-55.226,-57.5 r1.05
  circle w0.15: c-82.838,-57.5 r1.05
  circle w0.15: c-110.451,-57.5 r1.05
  circle w0.15: c-110.451,-2.5 r1.05
  circle w0.15: c-82.838,-2.5 r1.05
  circle w0.15: c-55.226,-2.5 r1.05
  circle w0.15: c-27.613,-2.5 r1.05
  pour cut-out: -135.564,-46.05 cw(c-135.564,-45) -136.614,-45 cw(c-135.564,-45) -135.564,-43.95 cw(c-135.564,-45) -134.514,-45 cw(c-135.564,-45)
  lines w0.254: -138.064,-60 0,-60 0,0 -138.064,0 -138.064,-60

## Silkscreen, mask and mechanical layers (free items; w line width, h text height)
Top Overlay:
  text "Micron-GLIN v.2 / (c)Shodan (Tula, Russia) / https://ampnuts.com" at -95.913,-13.997 h2.7
Mechanical 1:
  lines w0.254: -133.064,-55 -4.964,-55 ; -133.064,-5 -4.964,-5 ; -119.014,-55 -119.014,-5 ; -19.014,-55 -19.014,-5
Mechanical 13:
  lines w0.254: -133.064,-55 -133.064,-5 ; -4.964,-55 -4.964,-5